# Altium PCB RiscPC_VRAM.PcbDoc (part 1 of 2)
Units mm, origin at the board's own origin, x right, y up, seen from the top; angles counter-clockwise.
Board outline 102.87 x 28 mm, 4 copper layers (Top Layer, Inner 1, Inner 2, Bottom Layer), stack 2.173 mm thick; 29 components, 122 nets, 498 pads, 421 vias.
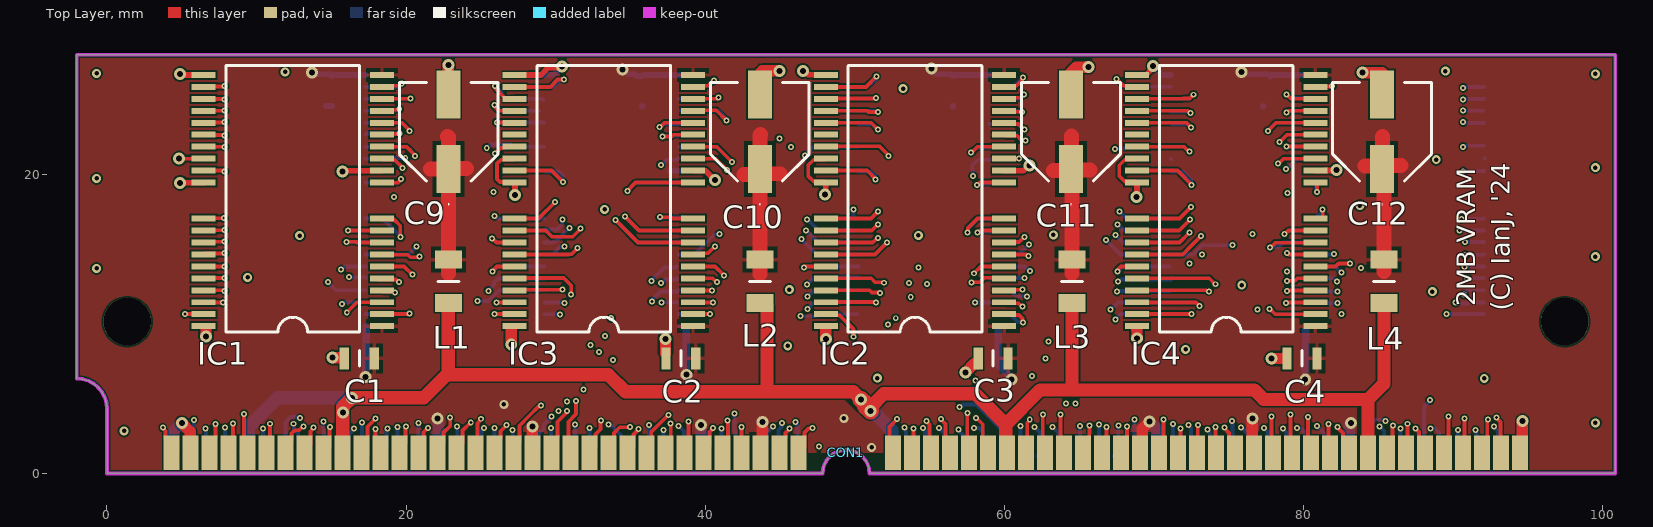
[diagram p0: Top Layer view]
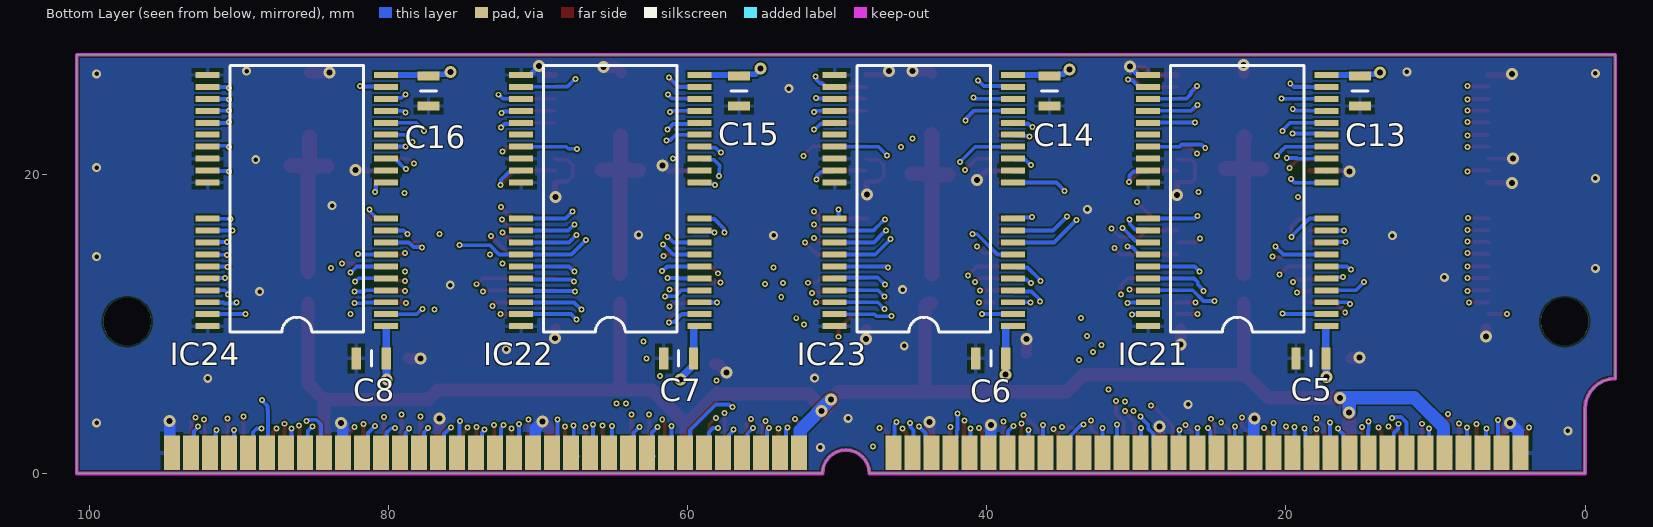
[diagram p1: Bottom Layer view, seen from below]
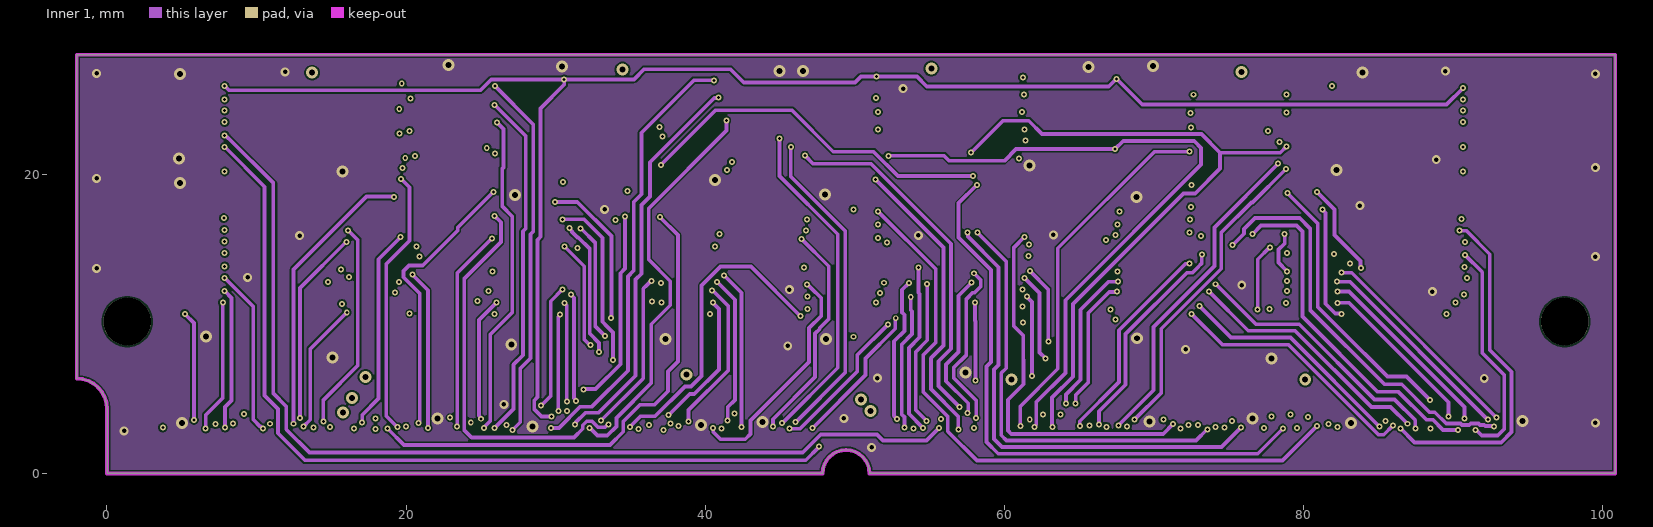
[diagram p2: Inner 1]
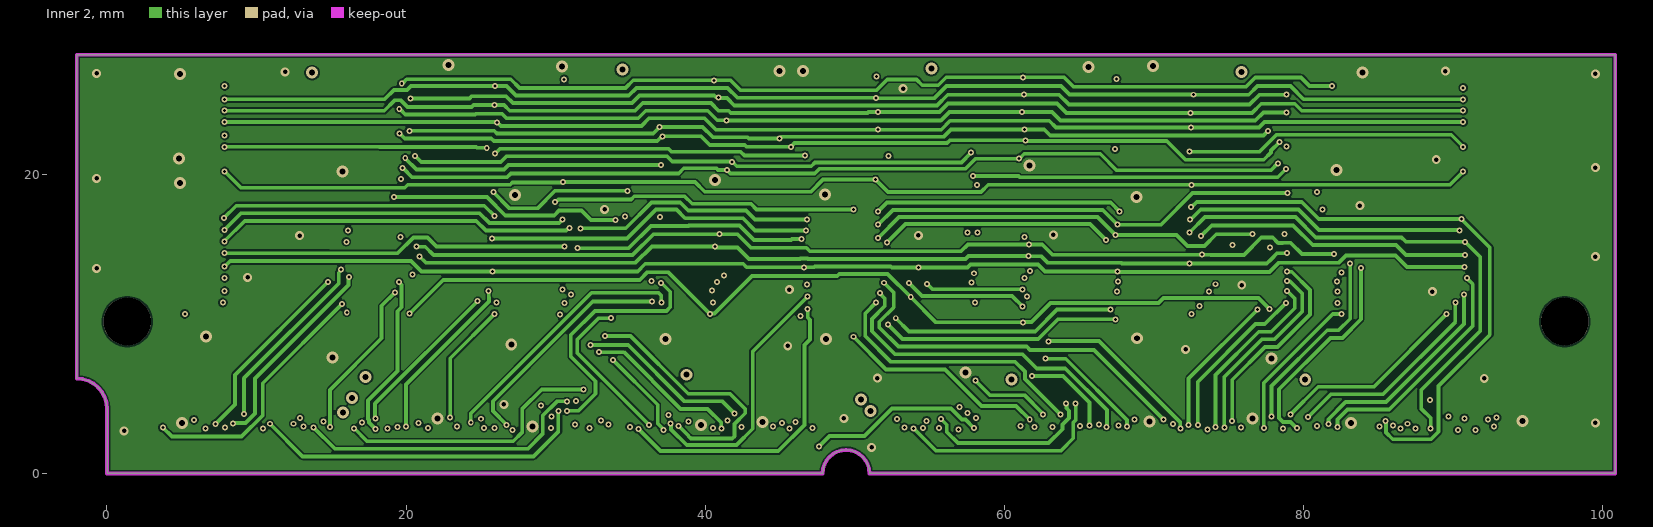
[diagram p3: Inner 2]
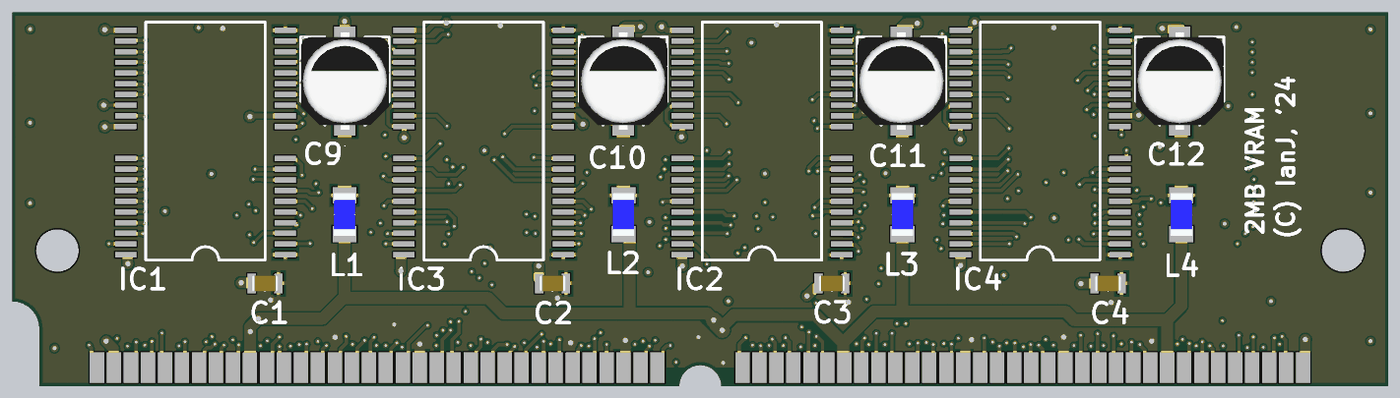
[diagram p5: 3D render of the assembled board from above, using the file's embedded part models]
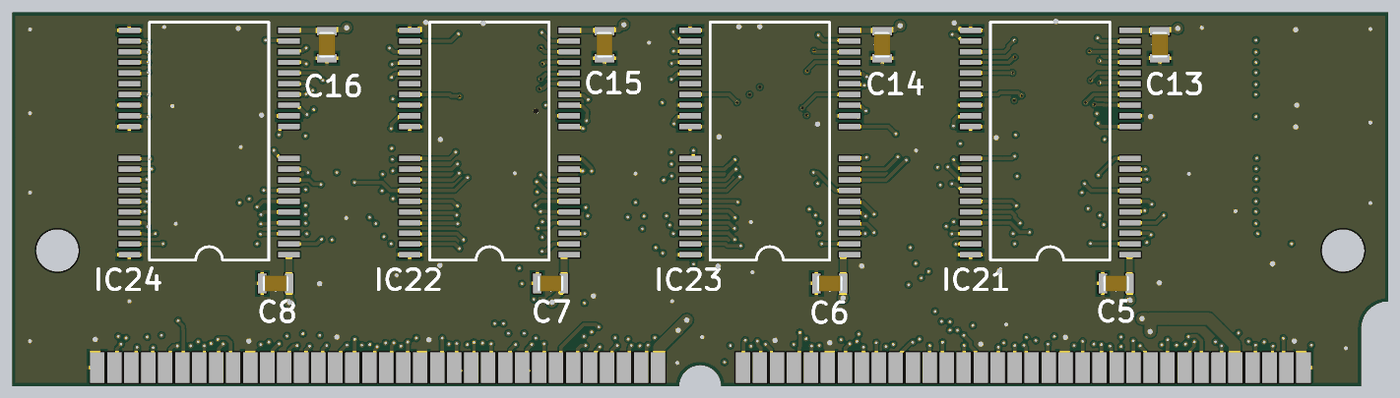
[diagram p6: 3D render of the assembled board from below, using the file's embedded part models]

## Layer stack, top to bottom
Top Solder: solder mask 0.0102, Solder Resist, Dk 3.5
Top Layer: signal copper 0.0356
Dielectric 2: prepreg 0.635, PP-006, Dk 4.1
Inner 1: signal copper 0.035
Dielectric 1: dielectric 0.762, FR-4, Dk 4.8
Inner 2: signal copper 0.035
Dielectric 3: prepreg 0.635, PP-006, Dk 4.1
Bottom Layer: signal copper 0.0356
Bottom Solder: solder mask 0.0102, Solder Resist, Dk 3.5

## Board outline
-2.023,28.003 -2.023,6.353 -1.627,6.314 -1.246,6.198 -0.896,6.01 -0.588,5.758 -0.335,5.45 -0.148,5.099 -0.032,4.719 0.007,4.323 0.007,0.003 47.847,0.003 47.877,0.309 47.966,0.603 48.111,0.875 48.307,1.113 48.544,1.308 48.816,1.453 49.11,1.542 49.417,1.573 49.723,1.542 50.017,1.453 50.289,1.308 50.527,1.113 50.722,0.875 50.867,0.603 50.957,0.309 50.987,0.003 100.847,0.003 100.847,28.003

## Design rules (kind name [scope] priority, off if disabled: settings)
Clearance [All] p1: gap=0.114 ignorepadtopadclearanceinfootprint=FALSE
HoleSize [All] p1: absolutevalues=TRUE maxlimit=3.81 minlimit=0.025 maxpercent=80.000 minpercent=20.000
MinimumSolderMaskSliver [All] p1: minsoldermaskwidth=0.127
PolygonConnect [All] p1: connectstyle=Relief reliefconductorwidth=0.254 reliefentries=4 polygonreliefangle="90 Angle" airgapwidth=0.254
RoutingVias [All] p1: holewidth=0.711 width=1.27 viastyle="Through Hole" minholewidth=0.711 minwidth=1.27 maxholewidth=0.711 maxwidth=1.27
SilkToSolderMaskClearance [IsPad] p1: minsilkscreentomaskgap=0.127 clearancetoexposedcopper=TRUE
SolderMaskExpansion [All] p1: expansion=0.102 istentingtop=FALSE
SupplyNets "Schematic Supply Nets_2" [InNet('VCC')] p1: voltage=0.000
SupplyNets "Schematic Supply Nets_1" [InNet('RAM_VCC')] p2: voltage=0.000
SupplyNets "Schematic Supply Nets" [InNet('GND')] p3: voltage=0.000
Width [All] p1: maxlimit=1.143 minlimit=0.254 preferedwidth=0.254
27 further rules are at their usual default settings.

## Components (designator, comment, footprint, x,y, rotation, side; value= is the part's Value field where it differs from the comment)
C1 "100nF" CAPC2012X145N 16.875,7.7 r180 top
C2 "100nF" CAPC2012X145N 38.375,7.7 r180 top
C3 "100nF" CAPC2012X145N 59.25,7.7 r180 top
C4 "100nF" CAPC2012X145N 79.9,7.7 r180 top
C5 "100nF" CAPC2012X145N 18.325,7.7 r0 bottom
C6 "100nF" CAPC2012X145N 39.732,7.7 r0 bottom
C7 "100nF" CAPC2012X145N 60.6,7.7 r0 bottom
C8 "100nF" CAPC2012X145N 81.15,7.7 r0 bottom
C9 "EEE-HA1C470AP" EEE1AA101SP 22.85,22.85 r90 top locked
C10 "EEE-HA1C470AP" EEE1AA101SP 43.65,22.85 r90 top locked
C11 "EEE-HA1C470AP" EEE1AA101SP 64.45,22.85 r90 top locked
C12 "EEE-HA1C470AP" EEE1AA101SP 85.25,22.85 r90 top locked
C13 "100nF" CAPC2012X145N 15.05,25.575 r270 bottom
C14 "100nF" CAPC2012X145N 35.808,25.575 r270 bottom
C15 "100nF" CAPC2012X145N 56.567,25.575 r270 bottom
C16 "100nF" CAPC2012X145N 77.325,25.575 r270 bottom
CON1 "RiscPC_VRAM_Edge" RiscPC_VRAM_Edge 3.782,0.25 r0 top locked
IC1 "VRAM_256x8" TSOP044-P-0400-1 12.425,18.25 r180 top locked
IC2 "VRAM_256x8" TSOP044-P-0400-1 54.025,18.25 r180 top locked
IC3 "VRAM_256x8" TSOP044-P-0400-1 33.225,18.25 r180 top locked
IC4 "VRAM_256x8" TSOP044-P-0400-1 74.825,18.25 r180 top locked
IC21 "VRAM_256x8" TSOP044-P-0400-1 23.25,18.25 r0 bottom locked
IC22 "VRAM_256x8" TSOP044-P-0400-1 65.167,18.25 r0 bottom locked
IC23 "VRAM_256x8" TSOP044-P-0400-1 44.208,18.25 r0 bottom locked
IC24 "VRAM_256x8" TSOP044-P-0400-1 86.125,18.25 r0 bottom locked
L1 "74279215" INDC3216X130N 22.825,12.85 r90 top
L2 "74279215" INDC3216X130N 43.675,12.85 r90 top
L3 "74279215" INDC3216X130N 64.525,12.85 r90 top
L4 "74279215" INDC3216X130N 85.375,12.85 r90 top

## Footprints (in the part's own frame and the unit in brackets; to place one, negate y for a bottom-side part, rotate by r counter-clockwise, add the part's x,y. Pads: shape width x height; smd on the part's side, far side on the other; paste and mask are expansions set on the pad)
CAPC2012X145N [mm]
  rect 0.62x1.47 smd: 1(-1,0) 2(1,0)
  silkscreen extent 0,-0.53 0,0.53, body extent -1,-0.63 1,0.63, height 1.45
EEE1AA101SP [mm]
  rect 3.2x1.6 smd: 1(-2.5,0) 2(2.5,0)
  silkscreen extent -4.88,-3.3 3.3,3.3, body extent 0,0 0,0
INDC3216X130N [mm]
  rect 1.2x1.8 smd: 1(-1.45,0) 2(1.45,0)
  silkscreen extent 0,-0.7 0,0.7, body extent -1.6,-0.8 1.6,0.8, height 1.3
RiscPC_VRAM_Edge [mm]
  rect 1.07x2.29 smd: A1(0.533,1.143) A2(1.803,1.143) A3(3.073,1.143) A4(4.343,1.143) A5(5.613,1.143) A6(6.883,1.143) A7(8.153,1.143) A8(9.423,1.143) A9(10.693,1.143) A10(11.963,1.143) A11(13.233,1.143) A12(14.503,1.143) A13(15.773,1.143) A14(17.043,1.143) A15(18.313,1.143) A16(19.583,1.143) A17(20.853,1.143) A18(22.123,1.143) A19(23.393,1.143) A20(24.663,1.143) A21(25.933,1.143) A22(27.203,1.143) A23(28.473,1.143) A24(29.743,1.143) A25(31.013,1.143) A26(32.283,1.143) A27(33.553,1.143) A28(34.823,1.143) A29(36.093,1.143) A30(37.363,1.143) A31(38.633,1.143) A32(39.903,1.143) A33(41.173,1.143) A34(42.443,1.143) A35(48.785,1.143) A36(50.055,1.143) A37(51.325,1.143) A38(52.595,1.143) A39(53.865,1.143) A40(55.135,1.143) A41(56.405,1.143) A42(57.675,1.143) A43(58.945,1.143) A44(60.215,1.143) A45(61.485,1.143) A46(62.755,1.143) A47(64.025,1.143) A48(65.295,1.143) A49(66.565,1.143) A50(67.835,1.143) A51(69.105,1.143) A52(70.375,1.143) A53(71.645,1.143) A54(72.915,1.143) A55(74.185,1.143) A56(75.455,1.143) A57(76.725,1.143) A58(77.995,1.143) A59(79.265,1.143) A60(80.535,1.143) A61(81.805,1.143) A62(83.075,1.143) A63(84.345,1.143) A64(85.615,1.143) A65(86.885,1.143) A66(88.155,1.143) A67(89.425,1.143) A68(90.695,1.143)
  rect 1.07x2.29 smd far side: B1(0.533,1.143) B2(1.803,1.143) B3(3.073,1.143) B4(4.343,1.143) B5(5.613,1.143) B6(6.883,1.143) B7(8.153,1.143) B8(9.423,1.143) B9(10.693,1.143) B10(11.963,1.143) B11(13.233,1.143) B12(14.503,1.143) B13(15.773,1.143) B14(17.043,1.143) B15(18.313,1.143) B16(19.583,1.143) B17(20.853,1.143) B18(22.123,1.143) B19(23.393,1.143) B20(24.663,1.143) B21(25.933,1.143) B22(27.203,1.143) B23(28.473,1.143) B24(29.743,1.143) B25(31.013,1.143) B26(32.283,1.143) B27(33.553,1.143) B28(34.823,1.143) B29(36.093,1.143) B30(37.363,1.143) B31(38.633,1.143) B32(39.903,1.143) B33(41.173,1.143) B34(42.443,1.143) B35(48.785,1.143) B36(50.055,1.143) B37(51.325,1.143) B38(52.595,1.143) B39(53.865,1.143) B40(55.135,1.143) B41(56.405,1.143) B42(57.675,1.143) B43(58.945,1.143) B44(60.215,1.143) B45(61.485,1.143) B46(62.755,1.143) B47(64.025,1.143) B48(65.295,1.143) B49(66.565,1.143) B50(67.835,1.143) B51(69.105,1.143) B52(70.375,1.143) B53(71.645,1.143) B54(72.915,1.143) B55(74.185,1.143) B56(75.455,1.143) B57(76.725,1.143) B58(77.995,1.143) B59(79.265,1.143) B60(80.535,1.143) B61(81.805,1.143) B62(83.075,1.143) B63(84.345,1.143) B64(85.615,1.143) B65(86.885,1.143) B66(88.155,1.143) B67(89.425,1.143) B68(90.695,1.143)
TSOP044-P-0400-1 [mm]
  rect 1.6x0.4 smd: 1(-5.962,8.4) 2(-5.962,7.6) 3(-5.962,6.8) 4(-5.962,6) 5(-5.962,5.2) 6(-5.962,4.4) 7(-5.962,3.6) 8(-5.962,2.8) 9(-5.962,2) 10(-5.962,1.2) 13(-5.962,-1.2) 14(-5.962,-2) 15(-5.962,-2.8) 16(-5.962,-3.6) 17(-5.962,-4.4) 18(-5.962,-5.2) 19(-5.962,-6) 20(-5.962,-6.8) 21(-5.962,-7.6) 22(-5.962,-8.4) 23(5.963,-8.4) 24(5.963,-7.6) 25(5.963,-6.8) 26(5.963,-6) 27(5.963,-5.2) 28(5.963,-4.4) 29(5.963,-3.6) 30(5.963,-2.8) 31(5.963,-2) 32(5.963,-1.2) 35(5.963,1.2) 36(5.963,2) 37(5.963,2.8) 38(5.963,3.6) 39(5.963,4.4) 40(5.963,5.2) 41(5.963,6) 42(5.963,6.8) 43(5.963,7.6) 44(5.963,8.4)
  silkscreen extent -4.46,-9.02 4.47,8.8, body extent -4.8,-8.87 4.8,8.67, height 1.5

## Part data
C1 C2 C3 C4 C5 C6 C7 C8 C13 C14 C15 C16: library part C2012X7R1H104K125AM, "Capacitor", Manufacturer_Name=TDK, Mouser Part Number=810-C2012X7R1H104KT5, Arrow Part Number=C2012X7R1H104K125AM, Arrow Price/Stock=https://www.arrow.com/en/products/c2012x7r1h104k125am/tdk, Datasheet Link=https://product.tdk.com/info/en/catalog/datasheets/mlcc_commercial_midvoltage_en.pdf, Height=1.45mm, Manufacturer_Part_Number=C2012X7R1H104K125AM, Mouser Price/Stock=https://www.mouser.com/Search/Refine.aspx?Keyword=810-C2012X7R1H104KT5
C9 C10 C11 C12: "Capacitor Polarised", Manufacturer_Name=Panasonic, Mouser Part Number=667-EEE-HA1C470AP, Arrow Part Number=EEE-HA1C470AP, Arrow Price/Stock=https://www.arrow.com/en/products/eeeha1c470ap/panasonic?utm_currency=USD&region=europe, Datasheet Link=http://industrial.panasonic.com/cdbs/www-data/pdf/RDE0000/ABA0000C1148.pdf, Height=7.8mm, Manufacturer_Part_Number=EEE-HA1C470AP, Mouser Price/Stock=https://www.mouser.co.uk/ProductDetail/Panasonic/EEE-HA1C470AP?qs=d1CqaRUMZD%2FL5qU1hDRerg%3D%3D
L1 L2 L3 L4: "Inductor", Manufacturer_Name="Wurth Elektronik", Mouser Part Number=710-74279215, Datasheet Link=http://componentsearchengine.com/Datasheets/1/74279215.pdf, Height=1.3mm, Manufacturer_Part_Number=74279215, Mouser Price/Stock=https://www.mouser.co.uk/ProductDetail/Wurth-Elektronik/74279215?qs=5twSNpOB8IC%252BebnV0jQtuw%3D%3D

## Free pads (board coordinates)
  round 3.18 hole 3.18 unplated: 1(1.357,10.163) 1(97.467,10.163)

## Via types
v1: diameter 0.4, hole 0.2, Top Layer to Bottom Layer, tented both sides, 347 vias
v2: diameter 0.8, hole 0.4, Top Layer to Bottom Layer, tented both sides, 46 vias
v3: diameter 0.6, hole 0.3, Top Layer to Bottom Layer, tented both sides, 28 vias

## Nets (pads, with @x,y where several pads share a name; then routed paths per layer and width w, separated by ;. In a path a pad name is that pad's centre, name@x,y a point inside that pad or via, vN(x,y) a via of type N, cw(c..) or ccw(c..) an arc to the next point about the centre after c; other vN are vias at no path point)
Cas0*: CON1.B40 IC1.29 IC21.29 | length 94.7
  Top Layer w0.254: IC1.29@6.462,21.85 6.465,21.847 7.871,21.847 v1(7.874,21.844)
  Inner 1 w0.254: v1(7.874,21.844) 10.541,19.177 10.541,5.21 11.43,4.321 11.43,2.692 13.233,0.889 46.725,0.889 47.6,1.764 v1(47.6,1.803)
  Inner 2 w0.254: v1(7.874,21.844) 18.188,21.844 18.207,21.825 24.685,21.825 24.733,21.777 v1(25.393,21.777) ; v1(47.6,1.803) 48.311,2.515 50.648,2.515 52.476,4.343 56.431,4.343 57.171,3.604 57.398,3.604 57.954,3.048 v1(57.975,3.048)
  Bottom Layer w0.254: v1(25.393,21.777) 25.433,21.777 25.646,21.99 26.983,21.99 27.123,21.85 IC21.29@29.213,21.85 ; v1(57.975,3.048) 58.293,3.048 58.577,2.764 58.577,1.892 CON1.B40@58.801,1.668
Cas1*: CON1.B43 IC2.29 IC22.29 | length 55.7
  Top Layer w0.254: IC2.29@48.062,21.85 48.088,21.876 51.648,21.876 52.248,21.276 v1(52.248,21.244)
  Inner 1 w0.254: v1(52.248,21.244) 55.974,21.244 56.314,20.904 60,20.904 60.783,21.687 v1(67.407,21.687) 67.945,22.225 72.695,22.225 73.152,21.768 73.152,20.65 64.081,11.579 64.081,6.728 62.126,4.773 62.126,3.801 62.138,3.79 62.138,3.297 62.004,3.163 v1(62.004,3.124)
  Bottom Layer w0.254: v1(62.004,3.124) 62.375,2.752 62.375,2.024 62.611,1.788 62.611,1.445 62.319,1.153 CON1.B43@62.233,1.153 ; v1(67.407,21.687) 67.435,21.715 67.986,21.715 68.115,21.844 IC22.29@71.111,21.844
Cas2*: CON1.B41 IC3.29 IC23.29 | length 54.7
  Top Layer w0.254: v1(25.934,21.409) 25.974,21.409 26.342,21.777 26.589,21.777 26.659,21.847 IC3.29@27.278,21.847
  Inner 1 w0.254: v1(46.663,21.263) 47.221,20.705 51.095,20.705 56.433,15.367 56.433,8.34 55.595,7.503 55.595,5.847 56.998,4.444 v1(56.998,4.436)
  Inner 2 w0.254: v1(25.934,21.409) 25.974,21.409 26.282,21.717 37.541,21.717 37.744,21.514 42.367,21.514 42.618,21.263 v1(46.663,21.263)
  Bottom Layer w0.254: v1@46.663,21.275 47.238,21.85 IC23.29@50.171,21.85 ; v1(56.998,4.436) 57.038,4.436 57.225,4.623 58.115,4.623 59.842,2.896 CON1.B41@59.842,2.261
Cas3*: CON1.B42 IC4.29 IC24.29 | length 50.6
  Top Layer w0.254: IC4.29@68.852,21.847 72.02,21.847 72.35,21.517 v1(72.39,21.517)
  Inner 1 w0.254: v1(61.085,3.175) 61.057,3.203 61.057,4.491 63.573,7.007 63.573,15.059 70.031,21.517 v1(72.39,21.517)
  Inner 2 w0.254: v1(72.39,21.517) 77.052,21.517 78.185,22.65 89.872,22.65 v1(90.678,21.844)
  Bottom Layer w0.254: v1(61.085,3.175) 61.085,1.765 CON1.B42@61.457,1.393 ; v1(90.678,21.844) 90.718,21.844 90.787,21.913 IC24.29@92.087,21.913
Dsf: CON1.B39 IC1.31 IC2.31 IC3.31 IC4.31 IC21.31 IC22.31 IC23.31 IC24.31 | length 125.4
  Top Layer w0.254: IC1.31@6.462,20.25 7.777,20.25 7.834,20.193 v1(7.874,20.193) ; IC3.31@27.262,20.25 29.715,20.25 v1(30.48,19.485) ; IC2.31@48.062,20.25 50.833,20.25 51.384,19.699 v1(51.384,19.66) ; IC4.31@68.862,20.25 71.587,20.25 71.736,20.101 71.736,20.085 72.517,19.304 v1(72.517,19.301)
  Inner 1 w0.254: v1@51.384,19.65 55.925,15.109 55.925,8.551 55.087,7.713 55.087,5.644 56.921,3.81 v1(56.921,2.946)
  Inner 2 w0.254: v1(7.874,20.193) 8.965,19.102 19.912,19.102 20.113,19.304 26.964,19.304 27.117,19.457 30.452,19.457 v1(30.48,19.485) ; v1@30.5,19.505 30.52,19.485 39.322,19.485 39.964,18.843 47.062,18.843 47.879,19.66 51.389,19.66 52.227,18.821 58.445,18.821 58.925,19.301 v1(72.517,19.301) 89.786,19.301 v1(90.678,20.193)
  Bottom Layer w0.254: IC21.31@29.213,20.25 29.275,20.187 30.181,20.187 30.452,19.916 30.452,19.513 v1(30.48,19.485) ; IC23.31@50.171,20.25 50.244,20.177 51.095,20.177 51.356,19.916 51.356,19.688 v1(51.384,19.66) ; v1(56.921,2.946) 56.921,2.907 57.239,2.589 57.239,1.801 CON1.B39@57.307,1.733 ; IC22.31@71.129,20.25 71.202,20.177 71.941,20.177 72.087,20.031 72.489,19.629 72.489,19.329 v1(72.517,19.301) ; v1(90.678,20.193) 90.706,20.221 92.058,20.221 IC24.31@92.087,20.25
Dt0*: CON1.B45 IC1.7 IC2.7 IC3.7 IC4.7 | length 82.3
  Top Layer w0.254: IC1.7@18.664,14.627 20.111,14.627 20.281,14.458 20.762,14.458 20.773,14.469 20.859,14.469 v1(20.887,14.497) ; IC3.7@39.492,14.627 39.587,14.723 40.177,14.723 v1(40.64,15.186) ; IC2.7@60.32,14.627 60.342,14.65 61.462,14.65 61.561,14.551 v1(61.601,14.551) ; v1(78.908,14.732) 78.948,14.732 79.03,14.65 IC4.7@80.787,14.65
  Inner 1 w0.254: v1(65.049,3.175) 65.041,3.183 65.041,3.497 67.666,6.121 67.666,9.576 72.11,14.02 72.355,14.02 v1(72.383,14.048)
  Inner 2 w0.254: v1(20.887,14.497) 20.91,14.497 21.309,14.097 35.346,14.097 36.435,15.186 v1(40.64,15.186) ; v1@40.64,15.113 42.164,15.113 42.926,14.351 46.349,14.351 46.368,14.37 46.85,14.37 46.869,14.351 57.404,14.351 57.604,14.551 v1(61.601,14.551) ; v1@61.597,14.548 61.613,14.532 62.455,14.532 62.89,14.097 67.805,14.097 67.853,14.048 v1(72.383,14.048) ; v1@72.439,14.048 77.546,14.048 77.849,14.351 77.851,14.351 78.232,14.732 v1(78.908,14.732)
  Bottom Layer w0.254: v1(65.049,3.175) 65.049,1.485 CON1.B45@65.151,1.384
Dt1*: CON1.B46 IC21.7 IC22.7 IC23.7 IC24.7 | length 91.4
  Inner 1 w0.254: v1(66.319,3.277) 66.319,4.166 68.094,5.94 68.094,9.318 72.203,13.427 72.584,13.427 72.964,13.808 72.964,13.822 73.19,14.048 73.19,14.614 v1(73.206,14.629)
  Inner 2 w0.254: v1(20.688,15.166) 21.283,15.166 21.844,14.605 35.135,14.605 36.532,16.002 42.15,16.002 43.063,15.089 46.76,15.089 46.99,14.859 57.099,14.859 57.56,15.32 v1(61.634,15.32) ; v1@61.638,15.324 61.642,15.32 62.531,15.32 63.222,14.629 v1(73.206,14.629) 73.787,14.629 ; 73.799,14.617 76.018,14.617 77.18,15.779 77.947,15.779 78.305,15.421 78.614,15.421 ; 78.614,15.422 78.668,15.422 79.149,15.422 79.893,14.678 v1(82.041,14.678)
  Bottom Layer w0.254: IC21.7@17.288,14.65 20.172,14.65 v1(20.688,15.166) ; IC23.7@38.246,14.65 39.282,14.65 40.634,16.002 v1(40.949,16.002) ; IC22.7@59.759,14.627 59.855,14.627 59.877,14.65 60.964,14.65 v1(61.634,15.32) ; v1(66.319,3.277) 66.319,1.534 CON1.B46@66.472,1.381 ; IC24.7@80.162,14.65 81.974,14.65 82.002,14.678 v1(82.041,14.678)
GND: C1.2 C2.2 C3.2 C4.2 C5.2 C6.2 C7.2 C8.2 C9.2 C10.2 C11.2 C12.2 C13.2 C14.2 C15.2 C16.2 CON1.A2 CON1.A20 CON1.A32 CON1.A48 CON1.A54 CON1.A68 CON1.B1 CON1.B15 CON1.B29 CON1.B49 CON1.B59 CON1.B68 IC1.14 IC1.23 IC1.30 IC1.32 IC1.44 IC2.14 IC2.23 IC2.30 IC2.32 IC2.44 IC3.14 IC3.23 IC3.30 IC3.32 IC3.44 IC4.14 IC4.23 IC4.30 IC4.32 IC4.44 IC21.14 IC21.23 IC21.30 IC21.32 IC21.44 IC22.14 IC22.23 IC22.30 IC22.32 IC22.44 IC23.14 IC23.23 IC23.30 IC23.32 IC23.44 IC24.14 IC24.23 IC24.30 IC24.32 IC24.44 | length 66.7
  Top Layer w0.254: v2(4.825,21.05) IC1.30@6.462,21.05 ; v2(4.9,19.425) v2@4.912,19.437 ; IC3.30@27.262,21.05 27.189,20.977 26.336,20.977 26.081,20.722 26.081,19.689 26.276,19.495 27.216,19.495 IC3.32@27.28,19.431 ; IC2.32@48.062,19.45 47.989,19.523 47.251,19.523 46.881,19.892 46.881,20.608 47.251,20.977 47.989,20.977 IC2.30@48.062,21.05 ; IC4.32@68.862,19.45 68.789,19.523 68.051,19.523 67.681,19.892 67.681,20.608 68.051,20.977 68.789,20.977 IC4.30@68.862,21.05 ; IC4.14@80.787,20.25 IC4.14@80.8,20.237
  Top Layer w0.381: v2(4.9,26.7) 4.95,26.65 IC1.23@6.462,26.65 ; v2@4.925,19.45 IC1.32@6.462,19.45 ; v2(15.748,20.193) 15.805,20.25 IC1.14@18.387,20.25 ; IC3.23@27.262,26.65 29.012,26.65 29.485,27.123 30.349,27.123 v2(30.429,27.203) ; v2(27.28,18.618) IC3.32@27.28,19.431 ; IC3.14@39.221,20.241 40.026,20.241 v2(40.641,19.624) ; v2(46.525,26.917) 46.638,26.917 46.896,26.66 48.053,26.66 IC2.23@48.062,26.65 ; v2(48.006,18.669) 48.062,18.725 IC2.32@48.062,19.45 ; IC2.14@59.987,20.25 61.273,20.25 61.616,20.593 v2(61.689,20.593) ; v2(68.834,18.478) 68.834,18.523 68.862,18.551 IC4.32@68.862,19.45 ; IC4.23@68.862,26.65 69.462,26.65 69.846,27.034 69.846,27.174 v2(69.926,27.254) ; IC4.14@80.812,20.241 81.378,20.241 81.397,20.259 82.16,20.259 v2(82.202,20.301)
  Top Layer w0.762: v2(5.004,3.378) 5.004,3.368 5.563,2.809 CON1.A2@5.563,2.362 ; IC1.44@6.622,9.669 6.622,9.177 v2(6.629,9.169) ; v2(15.094,7.747) 15.101,7.74 15.61,7.74 C1.2@15.65,7.7 ; C9.2@22.832,26.803 v2@22.832,27.318 ; v2(27.032,8.636) 27.039,8.643 IC3.44@27.039,9.669 ; CON1.A20@28.448,2.286 v2(28.448,3.158) ; v2(37.336,9.005) 37.343,8.998 C2.2@37.343,8.054 ; C10.2@43.682,26.778 43.821,26.917 44.951,26.917 v2(44.958,26.924) ; CON1.A32@43.815,1.905 v2(43.815,3.429) ; 48.057,9.607 48.068,9.597 48.068,8.998 v2(48.075,8.99) ; v2(57.392,6.758) 57.403,6.758 57.99,7.346 C3.2@58.179,7.346 ; C11.2@64.432,26.803 64.8,27.171 65.626,27.171 v2(65.634,27.178) ; IC4.44@68.857,9.657 68.868,9.647 68.868,9.051 v2(68.875,9.044) ; CON1.A48@69.088,1.905 69.231,2.048 69.231,3.003 69.698,3.47 v2(69.698,3.48) ; CON1.A54@76.581,1.509 v2(76.581,3.683) ; v2(77.869,7.683) 77.876,7.69 78.665,7.69 C4.2@78.675,7.7 ; v2(83.947,26.797) 83.953,26.803 C12.2@85.257,26.803 ; CON1.A68@94.477,1.393 94.631,1.547 94.631,3.486 94.64,3.495 v2(94.64,3.505)
  Bottom Layer w0.254: IC23.14@38.233,20.237 IC23.14@38.246,20.25 ; IC22.30@71.129,21.05 IC22.30@71.142,21.037 ; IC24.30@92.087,21.05 IC24.30@92.1,21.063
  Bottom Layer w0.381: C13.2@14.625,24.575 C13.2@15.05,24.575 ; IC21.14@17.278,20.241 IC21.14@17.288,20.25 ; IC21.23@29.213,26.65 29.222,26.66 29.885,26.66 v2(30.429,27.203) ; C14.2@35.756,24.523 C14.2@35.808,24.575 ; IC23.14@37.621,20.225 37.636,20.241 IC23.14@38.221,20.241 ; C15.2@56.514,24.523 C15.2@56.567,24.575 ; v2(69.926,27.254) 70.529,26.65 IC22.23@71.129,26.65 ; C16.2@77.273,24.523 C16.2@77.325,24.575
  Bottom Layer w0.762: CON1.B1@4.315,1.393 4.469,1.547 4.469,2.833 5.004,3.368 v2(5.004,3.378) ; CON1.B15@22.093,2.032 22.158,2.098 22.158,3.612 22.114,3.656 v2(22.114,3.667) ; v2(39.726,3.251) 39.733,3.244 39.733,2.439 CON1.B29@39.878,2.293 ; v2@69.705,3.473 70.193,2.984 70.193,1.547 CON1.B49@70.347,1.393 ; CON1.B59@83.058,1.755 83.058,3.266 83.16,3.368 v2(83.16,3.378) ; CON1.B68@94.615,2.475 94.633,2.494 94.633,3.498 v2(94.64,3.505)
  other v2: 22.825,27.325
  other v3: 51.13,1.753 1.143,2.845 99.517,3.378 49.276,3.683 26.543,4.623 92.084,6.362 51.511,6.375 72.111,8.306 45.517,8.534 88.621,12.167 45.618,12.294 75.87,12.598 9.398,13.106 -0.686,13.716 99.517,14.503 12.878,15.9 54.254,15.926 63.271,15.951 33.274,17.653 83.769,17.907 -0.686,19.736 99.517,20.447 88.875,20.98 53.238,25.73 99.517,26.721 -0.686,26.746 11.913,26.848 89.484,26.899
Qsf: CON1.B38 IC1.28 | length 69.9
  Top Layer w0.254: IC1.28@6.462,22.65 6.484,22.628 7.852,22.628 v1(7.874,22.606)
  Inner 1 w0.254: v1(7.874,22.606) 7.914,22.606 8.095,22.425 8.115,22.425 11.125,19.414 11.125,5.344 11.989,4.481 11.989,2.954 13.545,1.397 46.516,1.397 47.726,2.607 51.495,2.607 51.889,2.213 54.791,2.213 v1(55.626,3.048)
  Bottom Layer w0.254: v1(55.626,3.048) 56.011,2.663 56.011,1.765 CON1.B38@56.261,1.515
Ra0: CON1.B17 IC1.27 IC2.27 IC3.27 IC4.27 IC21.27 IC22.27 IC23.27 IC24.27 | length 124.3
  Top Layer w0.254: IC1.27@6.462,23.45 6.485,23.473 7.852,23.473 v1(7.874,23.495) ; v1(26.071,23.476) 26.084,23.463 IC3.27@27.259,23.463 ; IC2.27@48.69,23.495 48.735,23.45 51.099,23.45 v1(51.562,22.987) ; IC4.27@68.904,23.45 72.181,23.45 v1(72.492,23.139)
  Inner 1 w0.254: v1(25.206,3.055) 25.206,3.094 25.629,3.516 25.629,9.296 27.102,10.77 27.102,17.191 26.435,17.857 26.435,20.385 26.515,20.465 26.515,23.032 v1(26.071,23.476)
  Inner 2 w0.254: v1(7.874,23.495) 26.052,23.495 v1(26.071,23.476) ; v1@26.082,23.487 26.1,23.487 26.346,23.241 35.731,23.241 36.239,23.749 39.961,23.749 40.723,22.987 v1(51.562,22.987) ; v1@51.546,22.987 55.778,22.987 56.375,23.584 63.005,23.584 63.449,23.139 v1(72.492,23.139) 77.031,23.139 77.387,23.495 v1(90.678,23.495)
  Bottom Layer w0.254: CON1.B17@24.806,1.747 25.043,1.984 25.043,2.852 25.206,3.015 v1(25.206,3.055) ; v1(26.071,23.476) 26.084,23.463 29.2,23.463 IC21.27@29.213,23.45 ; IC23.27@50.171,23.45 50.244,23.377 51.132,23.377 51.522,22.987 v1(51.562,22.987) ; IC22.27@71.129,23.45 71.202,23.377 72.254,23.377 v1(72.492,23.139) ; v1(90.678,23.495) 90.718,23.495 90.776,23.437 IC24.27@92.087,23.437
Ra1: CON1.B18 IC1.26 IC2.26 IC3.26 IC4.26 IC21.26 IC22.26 IC23.26 IC24.26 | length 127
  Top Layer w0.254: IC1.26@6.462,24.25 6.466,24.254 7.871,24.254 v1(7.874,24.257) ; v1(25.908,24.638) 25.936,24.61 25.936,24.483 26.162,24.257 27.256,24.257 IC3.26@27.262,24.25 ; IC2.26@48.062,24.257 50.84,24.257 50.926,24.171 v1(51.548,24.171) ; IC4.26@68.915,24.254 72.252,24.254 72.401,24.105 v1(72.441,24.105)
  Inner 1 w0.254: v1(25.908,3.048) 27.178,4.318 27.178,7.277 27.813,7.912 27.813,16.202 27.997,16.386 27.997,22.568 25.927,24.638 v1(25.908,24.638)
  Inner 2 w0.254: v1(7.874,24.257) 18.542,24.257 19.235,24.95 19.653,24.95 20.091,24.511 24.391,24.511 24.518,24.638 v1(25.908,24.638) 26.547,24.638 26.928,24.257 35.31,24.257 35.818,24.765 40.382,24.765 40.89,24.257 41.576,24.257 41.729,24.104 50.84,24.104 50.907,24.171 v1(51.548,24.171) 55.667,24.171 56.236,24.74 63.522,24.74 64.157,24.105 v1(72.441,24.105) 76.559,24.105 77.179,24.724 79.416,24.724 79.883,24.257 v1(90.678,24.257)
  Bottom Layer w0.254: CON1.B18@25.908,1.976 v1(25.908,3.048) ; v1(25.908,24.638) 25.948,24.638 26.336,24.25 IC21.26@28.881,24.25 ; IC23.26@49.957,24.257 51.423,24.257 51.508,24.171 v1(51.548,24.171) ; IC22.26@71.039,24.257 71.1,24.196 72.31,24.196 72.401,24.105 v1(72.441,24.105) ; v1(90.678,24.257) 90.681,24.254 92.011,24.254 IC24.26@92.014,24.25
Ra2: CON1.B19 IC1.25 IC2.25 IC3.25 IC4.25 IC21.25 IC22.25 IC23.25 IC24.25 | length 129.4
  Top Layer w0.254: IC1.25@6.462,25.05 6.478,25.035 7.858,25.035 v1(7.874,25.019) ; v1(25.944,25.904) 25.972,25.876 25.972,25.741 26.589,25.123 27.189,25.123 IC3.25@27.262,25.05 ; IC2.25@48.076,25.049 48.099,25.073 51.387,25.073 v1(51.41,25.095) ; IC4.25@68.872,25.05 71.936,25.05 71.964,25.078 72.398,25.078 v1(72.644,25.324)
  Inner 1 w0.254: v1(25.944,25.904) 28.505,23.343 28.505,16.176 28.321,15.992 28.321,7.702 27.635,7.016 27.635,3.428 v1(27.129,2.921)
  Inner 2 w0.254: v1(7.874,25.019) 18.567,25.019 19.183,25.635 20.053,25.635 20.321,25.904 26.718,25.904 27.349,25.273 34.889,25.273 35.397,25.781 41.489,25.781 42.15,25.12 51.385,25.12 v1(51.41,25.095) 55.321,25.095 56.134,25.908 63.79,25.908 64.352,25.346 72.622,25.346 v1(72.644,25.324) 76.342,25.324 76.926,25.908 79.121,25.908 80.01,25.019 v1(90.678,25.019)
  Bottom Layer w0.254: v1(25.944,25.904) 26.375,25.473 26.375,25.333 26.658,25.05 29.097,25.05 IC21.25@29.17,24.977 ; v1(27.129,2.921) 27.129,1.964 CON1.B19@27.346,1.747 ; IC23.25@50.235,25.05 50.258,25.073 51.387,25.073 v1(51.41,25.095) ; IC22.25@71.129,25.05 72.331,25.05 72.604,25.324 v1(72.644,25.324) ; v1(90.678,25.019) 90.694,25.035 92.034,25.035 IC24.25@92.087,25.088
Ra3: CON1.B20 IC1.24 IC2.24 IC3.24 IC4.24 IC21.24 IC22.24 IC23.24 IC24.24 | length 131.5
  Top Layer w0.254: IC1.24@6.462,25.85 6.493,25.88 7.846,25.88 v1(7.874,25.908) ; IC3.24@27.262,25.85 29.645,25.85 30.129,26.334 30.562,26.334 v1(30.573,26.345) ; IC2.24@48.062,25.85 50.742,25.85 v1(51.435,26.543) ; v1(67.488,26.391) 67.955,25.923 68.789,25.923 IC4.24@68.862,25.85
  Inner 1 w0.254: v1(7.874,25.908) 8.153,25.629 24.973,25.629 25.689,26.345 v1(30.573,26.345) ; v1(29.711,3.804) 29.057,3.804 28.575,4.286 28.575,4.902 28.778,5.105 28.778,15.621 28.981,15.824 28.981,24.409 30.573,26.001 v1(30.573,26.345) ; v1(90.678,25.781) 89.56,24.663 69.215,24.663 v1(67.488,26.391) 66.98,25.883 54.813,25.883 54.153,26.543 v1(51.435,26.543) 50.419,26.543 50.012,26.136 42.571,26.136 41.681,27.026 35.916,27.026 35.235,26.345 v1(30.573,26.345)
  Bottom Layer w0.254: CON1.B20@28.575,1.462 28.853,1.74 28.853,2.656 29.21,3.013 29.21,3.287 29.711,3.789 v1(29.711,3.804) ; IC21.24@29.213,25.85 29.813,25.85 30.28,26.317 30.545,26.317 v1(30.573,26.345) ; IC23.24@50.171,25.85 50.771,25.85 50.99,26.069 51.129,26.069 51.407,26.347 51.407,26.515 v1(51.435,26.543) ; v1(67.488,26.391) 67.517,26.391 68.055,25.852 71.127,25.852 IC22.24@71.129,25.85 ; v1(90.678,25.781) 90.718,25.781 90.787,25.85 IC24.24@92.087,25.85
Ra4: CON1.B21 IC1.21 IC2.21 IC3.21 IC4.21 IC21.21 IC22.21 IC23.21 IC24.21 | length 108.2
  Top Layer w0.254: IC1.21@18.387,25.85 18.46,25.923 19.518,25.923 19.671,26.076 v1(19.71,26.076) ; IC3.21@39.188,25.88 39.231,25.923 40.176,25.923 40.542,26.289 v1(40.582,26.289) ; IC2.21@59.987,25.85 60.06,25.923 60.811,25.923 61.168,26.28 61.168,26.376 61.241,26.449 v1(61.241,26.489) ; IC4.21@80.787,25.85 80.818,25.88 81.887,25.88 v1(81.915,25.908)
  Inner 1 w0.254: v1(29.682,3.048) 30.226,3.048 31.648,4.47 32.436,4.47 34.836,6.871 34.836,13.179 35.222,13.565 35.222,18.161 35.738,18.676 35.738,22.784 39.243,26.289 v1(40.582,26.289)
  Inner 2 w0.254: v1(19.71,26.076) 19.75,26.076 20.039,26.365 27,26.365 27.584,25.781 34.678,25.781 35.186,26.289 v1(40.582,26.289) ; v1@40.618,26.258 40.649,26.289 41.7,26.289 42.361,25.628 51.46,25.628 52.172,26.34 54.127,26.34 54.508,25.959 55.578,25.959 56.109,26.489 v1(61.241,26.489) ; v1@61.255,26.502 61.268,26.489 63.986,26.489 64.621,25.854 76.153,25.854 76.769,26.47 79.829,26.47 80.391,25.908 v1(81.915,25.908)
  Bottom Layer w0.254: IC21.21@17.288,25.85 19.002,25.85 19.478,25.85 19.704,26.076 v1(19.71,26.076) ; v1(29.682,3.048) 29.682,1.951 CON1.B21@29.718,1.915 ; IC23.21@38.735,25.908 40.201,25.908 v1@40.575,26.282 ; IC22.21@59.749,25.85 60.603,25.85 v1(61.241,26.489) ; IC24.21@80.636,25.836 80.68,25.88 81.887,25.88 v1(81.915,25.908)
Ra5: CON1.B22 IC1.20 IC2.20 IC3.20 IC4.20 IC21.20 IC22.20 IC23.20 IC24.20 | length 104
  Top Layer w0.254: IC1.20@18.387,25.05 18.399,25.062 20.286,25.062 v1(20.295,25.07) ; IC3.20@39.205,25.05 40.777,25.05 40.854,25.127 v1(40.894,25.127) ; IC2.20@59.939,25.123 61.073,25.123 61.277,25.327 v1(61.316,25.327) ; v1(78.867,25.327) 78.907,25.327 79.184,25.05 IC4.20@80.787,25.05
  Inner 1 w0.254: v1(31.293,3.277) 31.293,3.316 31.366,3.389 31.366,3.435 31.995,4.064 32.868,4.064 35.344,6.541 35.344,12.969 35.73,13.354 35.73,17.95 36.302,18.522 36.302,20.808 40.601,25.107 40.874,25.107 v1(40.894,25.127)
  Inner 2 w0.254: v1(20.295,25.07) 24.231,25.07 24.38,25.219 26.684,25.219 27.138,24.765 35.099,24.765 35.607,25.273 40.593,25.273 40.711,25.155 40.866,25.155 v1(40.894,25.127) ; v1@40.903,25.137 40.941,25.099 41.453,25.099 41.94,24.612 55.498,24.612 56.213,25.327 v1(61.316,25.327) 63.653,25.327 64.316,24.663 76.4,24.663 77.063,25.327 v1(78.867,25.327)
  Bottom Layer w0.254: IC21.20@17.288,25.05 20.275,25.05 v1(20.295,25.07) ; CON1.B22@31.277,2.319 31.293,2.335 v1(31.293,3.277) ; IC23.20@38.246,25.05 40.777,25.05 40.854,25.127 v1(40.894,25.127) ; IC22.20@59.863,25.037 59.877,25.052 61.041,25.052 v1(61.316,25.327) ; v1(78.867,25.327) 78.907,25.327 79.111,25.123 80.713,25.123 IC24.20@80.763,25.074
Ra6: CON1.B23 IC1.19 IC2.19 IC3.19 IC4.19 IC21.19 IC22.19 IC23.19 IC24.19 | length 104.7
  Top Layer w0.254: IC1.19@18.387,24.25 18.46,24.323 19.457,24.323 19.503,24.369 v1(19.543,24.369) ; IC3.19@39.932,24.288 40.738,24.288 v1(41.43,23.596) ; IC2.19@59.955,24.219 59.981,24.193 61.147,24.193 v1(61.174,24.165) ; v1(78.867,24.143) 78.907,24.143 79.014,24.25 IC4.19@80.787,24.25
  Inner 1 w0.254: v1(32.256,3.046) 32.296,3.046 32.802,2.54 33.452,2.54 34.061,3.15 34.061,3.708 36.395,6.042 36.395,9.979 37.665,11.249 37.665,12.856 36.22,14.3 36.22,17.722 41.43,22.932 v1(41.43,23.596)
  Inner 2 w0.254: v1(19.543,24.369) 19.582,24.369 19.948,24.003 24.601,24.003 24.655,24.057 26.409,24.057 26.717,23.749 35.52,23.749 36.028,24.257 40.172,24.257 40.807,23.622 v1@41.445,23.622 ; v1(41.43,23.596) 55.752,23.596 56.321,24.165 v1(61.174,24.165) 63.186,24.165 63.754,23.597 76.77,23.597 77.316,24.143 v1(78.867,24.143)
  Bottom Layer w0.254: IC21.19@17.288,24.25 17.291,24.254 19.388,24.254 19.503,24.369 v1(19.543,24.369) ; CON1.B23@32.255,1.393 32.256,1.394 v1(32.256,3.046) ; IC23.19@38.337,24.26 40.861,24.26 41.357,23.764 41.357,23.708 41.43,23.635 v1(41.43,23.596) ; IC22.19@59.612,24.254 61.086,24.254 v1(61.174,24.165) ; v1(78.867,24.143) 78.907,24.143 79.017,24.254 IC24.19@80.567,24.254
Ra7: CON1.B33 IC1.18 IC2.18 IC3.18 IC4.18 IC21.18 IC22.18 IC23.18 IC24.18 | length 100.9
  Top Layer w0.254: IC1.18@18.387,23.45 19.724,23.45 20.22,22.954 v1(20.22,22.914) ; v1(36.957,23.168) 36.997,23.168 37.279,23.45 IC3.18@39.187,23.45 ; IC2.18@60.639,23.398 60.66,23.377 60.927,23.377 61.301,23.003 v1(61.341,23.003) ; v1(77.627,22.914) 78.163,23.45 IC4.18@80.787,23.45
  Inner 1 w0.254: v1(44.958,22.406) 44.958,19.894 48.856,15.996 48.856,7.073 45.161,3.378 v1(45.136,3.378)
  Inner 2 w0.254: v1(20.22,22.914) 25.898,22.914 26.079,22.733 36.522,22.733 v1(36.957,23.168) ; v1@37.005,23.188 37.024,23.168 39.824,23.168 40.513,22.479 42.843,22.479 42.916,22.406 44.998,22.406 45.101,22.51 55.936,22.51 56.429,23.003 v1(61.341,23.003) 62.671,23.003 63.068,22.606 77.319,22.606 v1(77.627,22.914)
  Bottom Layer w0.254: IC21.18@17.288,23.45 19.724,23.45 20.22,22.954 v1(20.22,22.914) ; v1(36.957,23.168) 36.997,23.168 37.206,23.377 38.36,23.377 IC23.18@38.478,23.495 ; CON1.B33@44.898,1.982 44.898,2.892 45.108,3.103 45.108,3.35 v1(45.136,3.378) ; IC22.18@59.041,23.368 60.976,23.368 v1(61.341,23.003) ; v1(77.627,22.914) 78.163,23.45 IC24.18@80.162,23.45
Ra8: CON1.B34 IC1.17 IC2.17 IC3.17 IC4.17 IC21.17 IC22.17 IC23.17 IC24.17 | length 99.9
  Top Layer w0.254: IC1.17@18.387,22.65 18.443,22.705 19.524,22.705 v1(19.551,22.733) ; v1(37.15,22.54) 37.748,22.54 37.858,22.65 IC3.17@39.187,22.65 ; IC2.17@59.987,22.65 60.06,22.577 60.862,22.577 61.143,22.296 61.397,22.296 v1(61.425,22.268) ; v1(78.384,22.149) 78.886,22.65 IC4.17@80.787,22.65
  Inner 1 w0.254: v1(45.72,21.844) 45.72,19.85 49.364,16.206 49.364,6.743 46.06,3.439 v1(46.05,3.439)
  Inner 2 w0.254: v1(19.551,22.733) 19.58,22.733 19.91,22.403 25.69,22.403 25.868,22.225 36.796,22.225 37.111,22.54 v1(37.15,22.54) ; v1@37.198,22.56 37.215,22.542 39.731,22.542 40.303,21.971 42.632,21.971 42.759,21.844 v1(45.72,21.844) 45.964,22.088 56.175,22.088 56.366,22.279 61.414,22.279 61.453,22.24 61.556,22.24 61.559,22.238 70.853,22.238 72.111,20.98 77.337,20.98 77.825,21.468 77.825,21.589 v1(78.384,22.149)
  Bottom Layer w0.254: IC21.17@17.288,22.65 17.361,22.723 18.099,22.723 18.109,22.733 v1(19.551,22.733) ; v1(37.15,22.54) 37.19,22.54 37.227,22.577 38.173,22.577 IC23.17@38.246,22.65 ; v1(46.05,3.439) 46.05,3.4 46.177,3.273 46.177,1.441 CON1.B34@46.225,1.393 ; IC22.17@59.204,22.65 60.789,22.65 61.143,22.296 61.397,22.296 v1(61.425,22.268) ; v1(78.384,22.149) 78.886,22.65 80.625,22.65 IC24.17@80.636,22.661
Ra9: CON1.B24
RAM_VCC: C1.1 C2.1 C3.1 C4.1 C5.1 C6.1 C7.1 C8.1 C9.1 C10.1 C11.1 C12.1 C13.1 C14.1 C15.1 C16.1 IC1.1 IC1.22 IC2.1 IC2.22 IC3.1 IC3.22 IC4.1 IC4.22 IC21.1 IC21.22 IC22.1 IC22.22 IC23.1 IC23.22 IC24.1 IC24.22 L1.2 L2.2 L3.2 L4.2 | length 77.5
  Top Layer w0.508: C9.1@22.825,20.325 22.845,20.345 C9.1@22.85,20.35 ; C10.1@43.65,20.35 C10.1@43.675,20.325
  Top Layer w1: 21.641,20.345 C9.1@22.825,20.345 ; 22.784,22.53 22.825,22.489 C9.1@22.825,20.345 ; 22.825,13.386 L1.2@22.825,14.3 22.825,20.325 C9.1@22.825,20.345 ; C9.1@22.845,20.345 C9.1@22.825,20.345 ; C9.1@22.85,20.35 22.896,20.396 24.054,20.396 ; 42.596,19.99 C10.1@43.78,19.99 ; 43.675,13.335 L2.2@43.675,14.3 43.675,20.325 43.675,22.644 43.688,22.657 ; C10.1@43.851,20.041 45.009,20.041 ; 63.297,20.244 C11.1@64.481,20.244 ; 64.491,22.581 64.491,20.391 C11.1@64.45,20.35 64.525,20.275 L3.2@64.525,14.3 64.525,13.36 ; C11.1@64.552,20.295 65.71,20.295 ; 84.099,20.549 C12.1@85.284,20.549 ; 85.293,22.53 85.293,20.393 C12.1@85.25,20.35 85.375,20.225 L4.2@85.375,14.3 85.375,13.513 ; C12.1@85.355,20.599 86.512,20.599
  Bottom Layer w0.254: IC23.1@38.246,9.85 38.659,9.85 IC23.1@38.732,9.777 ; IC22.1@59.204,9.85 59.527,9.85 IC22.1@59.6,9.777 ; 80.162,9.625 IC24.1@80.162,9.85
  Bottom Layer w0.381: v2(13.716,26.797) 13.829,26.797 13.932,26.695 14.968,26.695 C13.1@15.05,26.613 ; C13.1@15.05,26.575 15.125,26.65 IC21.22@17.288,26.65 ; v2(34.468,27) 34.581,27 34.887,26.695 35.264,26.695 35.383,26.575 C14.1@35.808,26.575 ; C14.1@35.883,26.65 IC23.22@38.246,26.65 ; v2(55.118,27.07) 55.118,27.056 55.48,26.695 56.447,26.695 C15.1@56.567,26.575 ; C15.1@56.642,26.65 IC22.22@59.204,26.65 ; v2(75.844,26.848) 75.958,26.848 76.111,26.695 77.602,26.695 77.757,26.54 77.867,26.65 IC24.22@80.162,26.65
  Bottom Layer w0.508: v2(17.294,6.455) 17.31,6.47 17.31,7.651 C5.1@17.302,7.659 ; C5.1@17.325,7.7 IC21.1@17.325,9.796 ; C6.1@38.73,7.697 38.73,7.223 38.734,7.219 38.734,6.605 v2(38.735,6.604) ; C6.1@38.732,7.7 IC23.1@38.732,9.777 ; C7.1@59.6,7.7 IC22.1@59.6,9.777 ; C7.1@59.6,7.7 59.656,7.644 59.656,7.219 60.434,6.441 60.434,6.347 v2(60.49,6.291) ; v2(80.115,6.283) 80.133,6.301 80.133,7.683 C8.1@80.15,7.7 80.15,9.613 80.162,9.625
Rd0: CON1.B7 IC1.8 IC21.8 | length 19.9
  Top Layer w0.254: v1(16.002,15.494) 16.666,15.494 16.71,15.45 IC1.8@18.387,15.45
  Inner 1 w0.254: v1(12.913,3.708) 12.913,12.405 v1(16.002,15.494)
  Bottom Layer w0.254: CON1.B7@11.935,1.393 11.935,3.415 12.289,3.769 12.654,3.769 12.687,3.736 12.885,3.736 v1(12.913,3.708) ; v1(16.002,15.494) 16.024,15.472 17.266,15.472 IC21.8@17.288,15.45
Rd1: CON1.B9 IC1.9 IC21.9 | length 19.1
  Top Layer w0.254: v1(16.129,16.256) 16.132,16.253 18.384,16.253 IC1.9@18.387,16.25
  Inner 1 w0.254: v1(14.469,3.48) 14.469,4.918 16.764,7.214 16.764,15.621 v1(16.129,16.256)
  Bottom Layer w0.254: v1(14.469,3.48) 14.469,2.916 14.503,2.881 14.503,1.89 CON1.B9@14.573,1.82 ; v1(16.129,16.256) 16.132,16.253 17.284,16.253 IC21.9@17.288,16.25
Rd2: CON1.B11 IC1.10 IC21.10 | length 20.6
  Top Layer w0.254: IC1.10@18.387,17.05 18.46,16.977 19.199,16.977 19.614,16.563 19.614,15.83 v1(19.641,15.802)
  Inner 1 w0.254: v1(17.043,3.404) 17.071,3.432 17.071,3.917 18.161,5.006 18.161,14.322 v1(19.641,15.802)
  Bottom Layer w0.254: CON1.B11@17.015,1.393 17.043,1.421 v1(17.043,3.404) ; IC21.10@17.288,17.05 18.433,17.05 19.641,15.842 v1(19.641,15.802)
Rd3: CON1.B13 IC1.13 IC21.13 | length 23.4
  Top Layer w0.254: IC1.13@18.387,19.45 18.397,19.44 19.455,19.44 19.671,19.657 v1(19.671,19.683)
  Inner 1 w0.254: v1(19.431,3.124) 19.391,3.124 18.669,3.847 18.669,14.008 20.218,15.557 20.218,19.136 v1(19.671,19.683)
  Bottom Layer w0.254: IC21.13@17.288,19.45 17.297,19.44 19.428,19.44 v1(19.671,19.683) ; v1(19.431,3.124) 19.431,1.517 CON1.B13@19.555,1.393
Rd4: CON1.B25 IC1.35 IC21.35 | length 52.4
  Top Layer w0.254: IC1.35@6.462,17.05 6.476,17.064 7.801,17.064 v1(7.814,17.078)
  Inner 1 w0.254: v1(25.908,17.221) 25.915,17.221 26.34,16.797 26.34,15.469 23.882,13.011 23.882,2.915 24.384,2.413 31.231,2.413 31.81,2.992 31.81,3.224 32.075,3.489 32.438,3.489 32.579,3.348 32.837,3.089 33.295,3.089 33.482,3.277 v1(33.522,3.277)
  Inner 2 w0.254: v1(7.814,17.078) 8.644,17.907 25.229,17.907 25.908,17.228 v1(25.908,17.221)
  Bottom Layer w0.254: v1(25.908,17.221) 25.948,17.221 26.119,17.05 IC21.35@29.213,17.05 ; v1(33.522,3.277) 33.55,3.249 33.691,3.249 34.387,2.552 34.387,1.818 CON1.B25@34.966,1.239
Rd5: CON1.B27 IC1.36 IC21.36 | length 45.7
  Top Layer w0.254: IC1.36@6.462,16.25 6.48,16.268 7.826,16.268 v1(7.844,16.286)
  Inner 1 w0.254: v1(30.467,16.974) 30.493,17.001 31.889,17.001 33.128,15.762 33.128,10.143 33.468,9.803 33.833,9.438 v1(33.833,7.595)
  Inner 2 w0.254: v1(7.844,16.286) 8.957,17.399 24.917,17.399 25.569,16.748 30.24,16.748 v1(30.467,16.974) ; v1(33.833,7.595) 36.83,4.597 36.83,3.342 37.211,2.961 v1(37.211,2.921)
  Bottom Layer w0.254: IC21.36@29.213,16.25 29.286,16.323 30.08,16.323 30.442,16.685 30.442,16.949 v1(30.467,16.974) ; CON1.B27@37.211,1.534 v1(37.211,2.921)
Rd6: CON1.B30 IC1.37 IC21.37 | length 48.8
  Top Layer w0.254: IC1.37@6.462,15.45 6.508,15.496 7.816,15.496 v1(7.844,15.524)
  Inner 1 w0.254: v1(30.91,16.42) 30.91,16.38 31.094,16.197 31.094,16.152 31.457,15.789 31.514,15.789 32.285,15.018 32.285,9.343 32.893,8.735 v1(32.893,8.113)
  Inner 2 w0.254: v1(7.844,15.524) 9.211,16.891 24.689,16.891 25.34,16.24 30.691,16.24 30.871,16.42 v1(30.91,16.42) ; v1(32.893,8.113) 34.559,8.113 38.354,4.318 38.989,4.318 40.157,4.318 41.069,3.406 41.069,3.025 v1(41.083,3.011)
  Bottom Layer w0.254: IC21.37@29.213,15.45 29.813,15.45 29.886,15.523 30.013,15.523 v1(30.91,16.42) ; v1(41.083,3.011) 41.083,1.455 CON1.B30@41.145,1.393
Rd7: CON1.B31 IC1.38 IC21.38 | length 47.9
  Top Layer w0.254: IC1.38@6.462,14.65 6.517,14.704 7.846,14.704 v1(7.874,14.732)
  Inner 1 w0.254: v1(30.607,15.164) 31.917,13.854 31.917,8.959 32.066,8.81 32.07,8.81 32.295,8.585 v1(32.334,8.585)
  Inner 2 w0.254: v1(7.874,14.732) 14.859,14.732 14.868,14.723 19.424,14.723 20.485,15.784 21.427,15.784 22.025,15.186 30.585,15.186 v1(30.607,15.164) ; v1(32.334,8.585) 34.849,8.585 38.608,4.826 41.148,4.826 v1(41.961,4.013)
  Bottom Layer w0.254: IC21.38@29.213,14.65 29.813,14.65 30.298,15.136 30.579,15.136 v1(30.607,15.164) ; v1(41.961,4.013) 41.951,4.004 41.951,2.941 42.007,2.886 42.007,2.326 CON1.B31@42.586,1.747
Rd8: CON1.B50 IC2.8 IC22.8 | length 30.4
  Top Layer w0.254: IC2.8@59.987,15.45 60.013,15.476 60.993,15.476 v1(61.341,15.824)
  Inner 1 w0.254: v1(61.341,15.824) 60.633,15.116 60.633,9.846 61.268,9.211 61.268,7.591 61.271,7.588 61.271,5.968 60.233,4.93 60.233,2.883 60.464,2.652 70.622,2.652 v1(71.272,3.302)
  Bottom Layer w0.254: IC22.8@59.849,15.472 59.855,15.472 59.877,15.45 60.927,15.45 61.301,15.824 v1(61.341,15.824) ; v1(71.272,3.302) 71.272,1.679 CON1.B50@71.45,1.501
Rd9: CON1.B52 IC2.9 IC22.9 | length 34
  Top Layer w0.254: v1(58.191,16.11) 58.231,16.11 58.371,16.25 IC2.9@59.987,16.25
  Inner 1 w0.254: v1(58.191,16.11) 60.125,14.176 60.125,7.043 59.792,6.71 59.792,2.555 60.137,2.21 72.822,2.21 v1(73.566,2.954)
  Bottom Layer w0.254: v1(58.191,16.11) 58.231,16.11 58.298,16.177 59.645,16.177 IC22.9@59.678,16.209 ; v1(73.566,2.954) 73.566,2.915 73.749,2.732 73.749,1.245 CON1.B52@73.863,1.131
Rd10: CON1.B54 IC2.10 IC22.10 | length 39.3
  Top Layer w0.254: v1(57.531,16.11) 57.559,16.138 57.559,16.411 58.198,17.05 IC2.10@59.987,17.05
  Inner 1 w0.254: v1(57.531,16.11) 57.559,16.082 57.559,15.847 59.617,13.789 59.617,7.254 59.309,6.946 59.309,2.311 59.842,1.778 74.524,1.778 75.089,2.344 v1(75.819,3.073)
  Bottom Layer w0.254: v1(57.531,16.11) 57.559,16.138 57.559,16.36 58.211,17.012 59.82,17.012 IC22.10@59.87,17.062 ; v1(75.819,3.073) 75.859,3.073 76.289,2.643 CON1.B54@76.289,1.965
Rd11: CON1.B56 IC2.13 IC22.13 | length 44.3
  Top Layer w0.254: v1(58.166,19.304) 58.206,19.304 58.352,19.45 IC2.13@59.987,19.45
  Inner 1 w0.254: v1(58.166,19.304) 56.941,18.079 56.941,15.779 59.109,13.611 59.109,7.464 58.801,7.156 58.801,2.108 59.588,1.321 76.937,1.321 v1(78.613,2.997)
  Bottom Layer w0.254: v1(58.166,19.304) 58.206,19.304 58.279,19.377 59.131,19.377 IC22.13@59.204,19.45 ; v1(78.613,2.997) 78.85,2.76 78.872,2.739 78.872,1.494 CON1.B56@78.952,1.413
Rd12: CON1.B58 IC2.35 IC22.35 | length 70
  Top Layer w0.254: IC2.35@47.971,17.05 51.086,17.05 v1(51.562,17.526)
  Inner 1 w0.254: v1(51.562,17.526) 55.417,13.671 55.417,8.761 54.579,7.923 54.579,5.455 56.22,3.815 56.22,2.82 58.176,0.864 78.588,0.864 v1(80.899,3.175)
  Inner 2 w0.254: v1(51.562,17.526) 52.146,18.11 67.107,18.11 v1(67.691,17.526)
  Bottom Layer w0.254: v1(67.691,17.526) 68.167,17.05 IC22.35@71.129,17.05 ; v1(80.899,3.175) 81.374,2.7 81.374,1.584 CON1.B58@81.661,1.297
Rd13: CON1.B63 IC2.36 IC22.36 | length 57.9
  Top Layer w0.254: IC2.36@48.034,16.25 51.135,16.25 51.522,16.637 v1(51.562,16.637)
  Inner 1 w0.254: v1(78.918,18.745) 80.952,16.711 80.952,11.142 82.446,9.648 85.617,6.477 86.879,6.477 v1(88.446,4.91)
  Inner 2 w0.254: v1(51.562,16.637) 52.553,17.628 66.573,17.628 v1(67.564,16.637) 70.473,16.637 72.581,18.745 v1(78.918,18.745)
  Bottom Layer w0.254: v1(67.564,16.637) 67.604,16.637 67.991,16.25 IC22.36@71.129,16.25 ; CON1.B63@88.062,2.126 88.062,4.242 88.087,4.267 88.087,4.511 88.446,4.87 v1(88.446,4.91)
Rd14: CON1.B65 IC2.37 IC22.37 | length 59.1
  Top Layer w0.254: IC2.37@47.982,15.45 51.201,15.45 51.499,15.748 v1(51.538,15.748)
  Inner 1 w0.254: v1(76.581,16.002) 77.163,16.584 79.533,16.584 79.936,16.181 79.936,10.488 84.963,5.461 86.355,5.461 88.222,3.594 88.651,3.594 89.331,2.913 90.294,2.913 v1(90.313,2.894)
  Inner 2 w0.254: v1(51.538,15.748) 51.564,15.748 52.961,17.145 66.234,17.145 67.431,15.948 v1(67.437,15.948) 71.504,15.948 72.242,15.21 73.376,15.21 74.168,16.002 v1(76.581,16.002)
  Bottom Layer w0.254: v1(67.437,15.948) 67.442,15.948 67.94,15.45 IC22.37@71.129,15.45 ; CON1.B65@90.259,1.393 90.59,1.724 90.59,2.298 90.446,2.298 90.333,2.411 90.333,2.873 v1(90.313,2.894)
Rd15: CON1.B67 IC2.38 IC22.38 | length 58.3
  Top Layer w0.254: IC2.38@48.034,14.65 51.353,14.65 v1(52.143,15.44)
  Inner 1 w0.254: v1(75.26,15.265) 76.027,16.032 76.027,16.353 76.766,17.092 79.744,17.092 80.444,16.391 80.444,10.931 85.407,5.969 86.565,5.969 88.432,4.102 88.772,4.102 89.538,3.335 90.496,3.335 90.584,3.247 91.084,3.247 91.189,3.352 91.689,3.352 91.8,3.242 92.084,3.242 92.151,3.175 92.698,3.175 v1(92.722,3.151)
  Inner 2 w0.254: v1(52.143,15.44) 53.394,16.691 65.732,16.691 v1(66.802,15.621)
  Bottom Layer w0.254: v1(66.802,15.621) 67.773,14.65 67.891,14.65 72.603,14.65 73.218,15.265 v1(75.26,15.265) ; v1(92.722,3.151) 92.722,3.112 93.006,2.827 CON1.B67@93.006,1.6